# EAGLE board olm-flora-sqw-RTC-thermistor-1.5in (EAGLE 6.5.0)

Size 37.26 x 50.79 mm. Coordinates in mm from the lower left corner, seen from the top.
Outline: 0,0 37.26,0 37.26,50.79 0,50.79 0,0
Copper layers (1*16): Top 0.035mm / dielectric 1.5mm / Bottom 0.035mm
Design rules "default": minimum track width 10mil, minimum drill 24mil, track to track 8mil, track to pad 8mil, pad to pad 8mil, via to via 8mil, smd to smd 8mil, copper to edge 40mil, drill to drill 8mil, minimum pad ring 10mil, minimum via ring 8mil, stop-mask expansion 4mil, vias tented up to drill 0mil, thermal gap 10mil
Net classes: 0 default: width 0.254 mm, clearance 0.203 mm; 1 power: width 0.61 mm, clearance 0.203 mm

## Footprints (pad centres in the part's own frame; a part is rotated, then mirrored left to right if it is on the bottom)
BATTCON_12MM_SMT = smd 2.4 x 4.3: P$1 0,11.96 | smd 2.4 x 4.2: P$2 0,-4.1 | hole 0.95: 0,7.5 | hole 1.25: 0,0
KMR2 = smd 1 x 1: 1 2,0.8; 2 2,-0.8; 3 -2,0.8; 4 -2,-0.8
EVQ-Q2 = smd 3.2 x 1.2: A -3.4,-2; A' 3.4,-2; B -3.4,2; B' 3.4,2
C0805 = smd 1.3 x 1.5: 1 -0.85,0; 2 0.85,0
C0805K = smd 1.1 x 1.4: 1 -1,0; 2 1,0
C0805' = smd 1.3 x 1.5: 1 -0.95,0; 2 0.95,0
CHIPLED_0805 = smd 1.2 x 1.2: A 0,-1.05; C 0,1.05
JST-PH-2-SMT-RA = smd 1 x 4.6: 1 1,-3.7; 2 -1,-3.7 | smd 1.6 x 3.4: NC1 -3.4,1.5; NC2 3.4,1.5
CON10 = drill 0.914: 1 -5.08,-1.27 | drill 0.914 octagon: 2 -5.08,1.27; 3 -2.54,-1.27; 4 -2.54,1.27; 5 0,-1.27; 6 0,1.27; 7 2.54,-1.27; 8 2.54,1.27; 9 5.08,-1.27; 10 5.08,1.27
SOD-123 = smd 1.2 x 0.7: A 1.85,0; C -1.85,0
TQFP44 = smd 1.5 x 0.5: 1 -5.8,4; 2 -5.8,3.2; 3 -5.8,2.4; 4 -5.8,1.6; 5 -5.8,0.8; 6 -5.8,0; 7 -5.8,-0.8; 8 -5.8,-1.6; 9 -5.8,-2.4; 10 -5.8,-3.2; 11 -5.8,-4; 23 5.8,-4; 24 5.8,-3.2; 25 5.8,-2.4; 26 5.8,-1.6; 27 5.8,-0.8; 28 5.8,0; 29 5.8,0.8; 30 5.8,1.6; 31 5.8,2.4; 32 5.8,3.2; 33 5.8,4 | smd 0.5 x 1.5: 12 -4,-5.8; 13 -3.2,-5.8; 14 -2.4,-5.8; 15 -1.6,-5.8; 16 -0.8,-5.8; 17 0,-5.8; 18 0.8,-5.8; 19 1.6,-5.8; 20 2.4,-5.8; 21 3.2,-5.8; 22 4,-5.8; 34 4,5.8; 35 3.2,5.8; 36 2.4,5.8; 37 1.6,5.8; 38 0.8,5.8; 39 0,5.8; 40 -0.8,5.8; 41 -1.6,5.8; 42 -2.4,5.8; 43 -3.2,5.8; 44 -4,5.8
SO08 = smd 0.66 x 2.032: 1 -1.905,-3.073; 2 -0.635,-3.073; 3 0.635,-3.073; 4 1.905,-3.073; 5 1.905,3.073; 6 0.635,3.073; 7 -0.635,3.073; 8 -1.905,3.073
SOT23-5 = smd 0.55 x 1.2: 1 -0.95,-1.3; 2 0,-1.3; 3 0.95,-1.3; 4 0.95,1.3; 5 -0.95,1.3
SOT23 = smd 1 x 1.4: 1 -0.95,-1.1; 2 0.95,-1.1; 3 0,1.1
AYZ0202 = smd 1 x 1.15: 1 -2.5,2.825; 2 0,2.825; 3 2.5,2.825; 4 -2.5,-2.825; 5 0,-2.825; 6 2.5,-2.825 | hole 0.85: 1.5,0; -1.5,0
1X2-3.5MM = drill 1 pad 2.184: 1 1.8,0; 2 -1.7,0
2X03 = drill 1.016 octagon: 1 -2.54,-1.27; 2 -2.54,1.27; 3 0,-1.27; 4 0,1.27; 5 2.54,-1.27; 6 2.54,1.27
R1206 = smd 1.6 x 1.803: 1 -1.422,0; 2 1.422,0
R0805 = smd 1.1 x 1.4: 1 -1,0; 2 1,0
R0805' = smd 1.3 x 1.5: 1 -0.95,0; 2 0.95,0
EXB38V = smd 0.6 x 0.8: 1 -1.275,-0.75; 4 1.275,-0.75; 5 1.275,0.75; 8 -1.275,0.75 | smd 0.5 x 0.8: 2 -0.4,-0.75; 3 0.4,-0.75; 6 0.4,0.75; 7 -0.4,0.75
MA03-1 = drill 1.016 long: 1 -2.54,0; 2 0,0; 3 2.54,0
MA04-1 = drill 1.016 long: 1 -3.81,0; 2 -1.27,0; 3 1.27,0; 4 3.81,0
SO08' = smd 0.61 x 2.21: 1_CS -1.905,-2.616; 2_SO -0.635,-2.616; 3_WP 0.635,-2.616; 4_GND 1.905,-2.616; 5_SI 1.905,2.616; 6_SCK 0.635,2.616; 7_HOLD -0.635,2.616; 8_VCC -1.905,2.616
USB-MINIB = smd 2.5 x 0.5: D+ 2.5,0; D- 2.5,0.8; GND 2.5,-1.6; ID 2.5,-0.8; VBUS 2.5,1.6 | smd 2.5 x 2: GND@1 -3,-4.5; GND@2 -3,4.5; GND@3 2.5,4.5; GND@4 2.5,-4.5 | hole 0.9: 0,2.2; 0,-2.2
TC26H = drill 0.813: 1 -1.27,0; 2 1.27,0
NX5032 = smd 2 x 2.4: P$1 2,0; P$2 -2,0

## Placement (x,y rotation side)
BAT1  [BATTCON_12MM_SMT]  18.8,26.16 0 bottom
BOOT  SPST_TACT-KMR2  [KMR2]  26.92,12.45 90 top
BTN  [EVQ-Q2]  31.75,3.81 180 top
C1  10u  [C0805]  30.23,30.99 270 top
C2  18pF  [C0805K]  23.88,39.62 270 top
C3  18pF  [C0805K]  14.22,39.37 270 top
C9  0.1u  [C0805']  13.21,13.46 0 top
C10  10u  [C0805]  27.69,36.07 0 top
C11  10u  [C0805]  9.4,34.54 180 top
CHG  0805  [CHIPLED_0805]  8.64,13.46 270 top
CN2  [JST-PH-2-SMT-RA]  11.68,20.07 270 top
CON1  [CON10]  9.65,46.99 0 top
CON2  [CON10]  27.94,46.99 0 top
CON3  [CON10]  9.91,3.81 180 top
D1  SCHOTTKY  [SOD-123]  32,40.64 0 top
IC1  ATMEGA32U4-AU  [TQFP44]  18.8,30.73 135 top
IC2  DS1307  [SO08]  18.54,12.7 0 top
IC3  MCP73831  [SOT23-5]  4.06,14.22 270 top
IC4  MCP1700-33  [SOT23]  32.77,36.83 180 top
J1  AYZ0202  [AYZ0202]  33.02,12.45 90 top
J2  1X2-3.5MM  [1X2-3.5MM]  22.86,3.81 0 top
JP1  ICSP  [2X03]  5.59,39.12 180 top
L1  500mA  [R1206]  35.05,30.99 270 top
R1  22  [R0805]  8.89,26.42 180 top
R2  22  [R0805]  27.43,39.62 90 top
RC  22K  [R0805']  9.4,29.97 90 top
RN1  [EXB38V]  11.18,39.37 90 top
RN4  [EXB38V]  13.46,9.65 0 top
SV1  [MA03-1]  23.11,12.45 90 top
SV2  [MA04-1]  3.81,21.84 90 top
U$4  AT25F512BJEDEC  [SO08']  4.57,31.75 0 top
X1  USBSMD  [USB-MINIB]  30.73,22.35 180 top
X2  32.768kHz  [TC26H]  2.54,10.16 270 top
X3  8MHz  [NX5032]  18.8,40.64 180 top

## Library data of the parts
BAT1 IC3 J1 = SparkFunNew
BOOT BTN C2 C3 CN2 D1 IC2 IC4 J2 L1 R1 R2 = adafruit
C1 C10 C11 = resistor
C9 RC = rcl
CHG = led
CON1-CON3 = con-harting; OC_FARNELL: unknown; OC_NEWARK: unknown
IC1 X3 = adaprog
JP1 = pinhead
RN1 RN4 = resistor-dil; OC_FARNELL: unknown; OC_NEWARK: unknown
SV1 SV2 = con-lstb; OC_FARNELL: unknown; OC_NEWARK: unknown
U$4 = LowPowerLab
X1 = SparkFun
X2 = crystal; OC_FARNELL: unknown; OC_NEWARK: unknown

## Nets
+3V3: C11.1 CON1.10 CON2.10 CON3.10 IC1.6 IC1.14 IC1.24 IC1.34 IC1.42 IC1.44 IC4.2
+5V: D1.A IC1.7 L1.2
A0: IC1.36
A1: IC1.37
A2: IC1.38
A3: IC1.39
A4: IC1.40
A5: IC1.41
D0/RX: IC1.20
D1/TX: IC1.21
D4: BTN.B BTN.B' IC1.25
D6*: IC1.27
D7: IC1.1
D8: IC1.28 U$4.1_CS
D11: IC1.12
GND: BAT1.P$1 BOOT.2 BOOT.4 BTN.A BTN.A' C1.2 C2.2 C3.2 C9.2 C10.2 C11.2 CN2.2 CON1.6 CON2.6 CON3.6 IC1.5 IC1.15 IC1.23 IC1.33 IC1.35 IC1.43 IC2.4 IC3.2 IC4.1 JP1.6 RC.1 U$4.4_GND X1.GND
IO9*: IC1.29
IO10*: IC1.30
IO12*: IC1.26
MISO: CON1.5 CON2.5 CON3.5 IC1.11 JP1.1 U$4.2_SO
MOSI: CON1.3 CON2.3 CON3.3 IC1.10 JP1.4 U$4.5_SI
N$1: CHG.C IC3.1
N$2: R2.1 X1.D+
N$3: IC1.3 R1.2
N$4: IC1.4 R2.2
N$5: R1.1 X1.D-
N$6: IC2.1 X2.2
N$8: C2.1 IC1.17 X3.P$2
N$9: C3.1 IC1.16 X3.P$1
N$10: IC3.5 RC.2
N$11: J1.3 J1.6
N$12: CHG.A RN1.4
N$14: CON1.4
N$15: CON1.2
N$16: CON1.9
N$17: CON1.7
N$30: IC2.2 X2.1
N$36: BAT1.P$2 IC2.3
PC6: IC1.31
PC7: IC1.32
PD0: IC1.18
PD1: IC1.19
RST: BOOT.1 BOOT.3 IC1.13 JP1.5
RXLED/SS: IC1.8
SCK: CON1.1 CON2.1 CON3.1 IC1.9 JP1.3 U$4.6_SCK
SCL: IC2.6 RN4.1
SDA: IC2.5 RN4.2
TXLED: IC1.22
VBAT: CN2.1 CON1.8 CON2.8 CON3.8 IC3.3 J1.2 J1.5
VBUS: C10.1 D1.C IC3.4 L1.1 RN1.5 X1.VBUS
VCC: U$4.3_WP U$4.7_HOLD U$4.8_VCC
VDD: C1.1 IC4.3 J1.1 J1.4
VIN [power]: C9.1 IC2.8 RN4.7 RN4.8

## Tracks (layer width: path | path; a pad name or v marks a point on that pad's centre or on a via)
+3V3  (10 unrouted)
+5V  (2 unrouted)
D4  (2 unrouted)
D8  (1 unrouted)
GND  (27 unrouted)
MISO  (5 unrouted)
MOSI  (5 unrouted)
N$1  (1 unrouted)
N$2  (1 unrouted)
N$3  (1 unrouted)
N$4  (1 unrouted)
N$5  (1 unrouted)
N$6  (1 unrouted)
N$8  (2 unrouted)
N$9  (2 unrouted)
N$10  (1 unrouted)
N$11  (1 unrouted)
N$12  (1 unrouted)
N$30  (1 unrouted)
N$36  (1 unrouted)
RST  (3 unrouted)
SCK  (5 unrouted)
SCL  (1 unrouted)
SDA  (1 unrouted)
VBAT  (6 unrouted)
VBUS  (5 unrouted)
VCC  (2 unrouted)
VDD  (3 unrouted)
VIN  (3 unrouted)

## Text on the board
tPlace: OLM-PVC-A | pvos.org